# EAGLE board nokia-phone-arduino-shield (EAGLE 6.5.0)
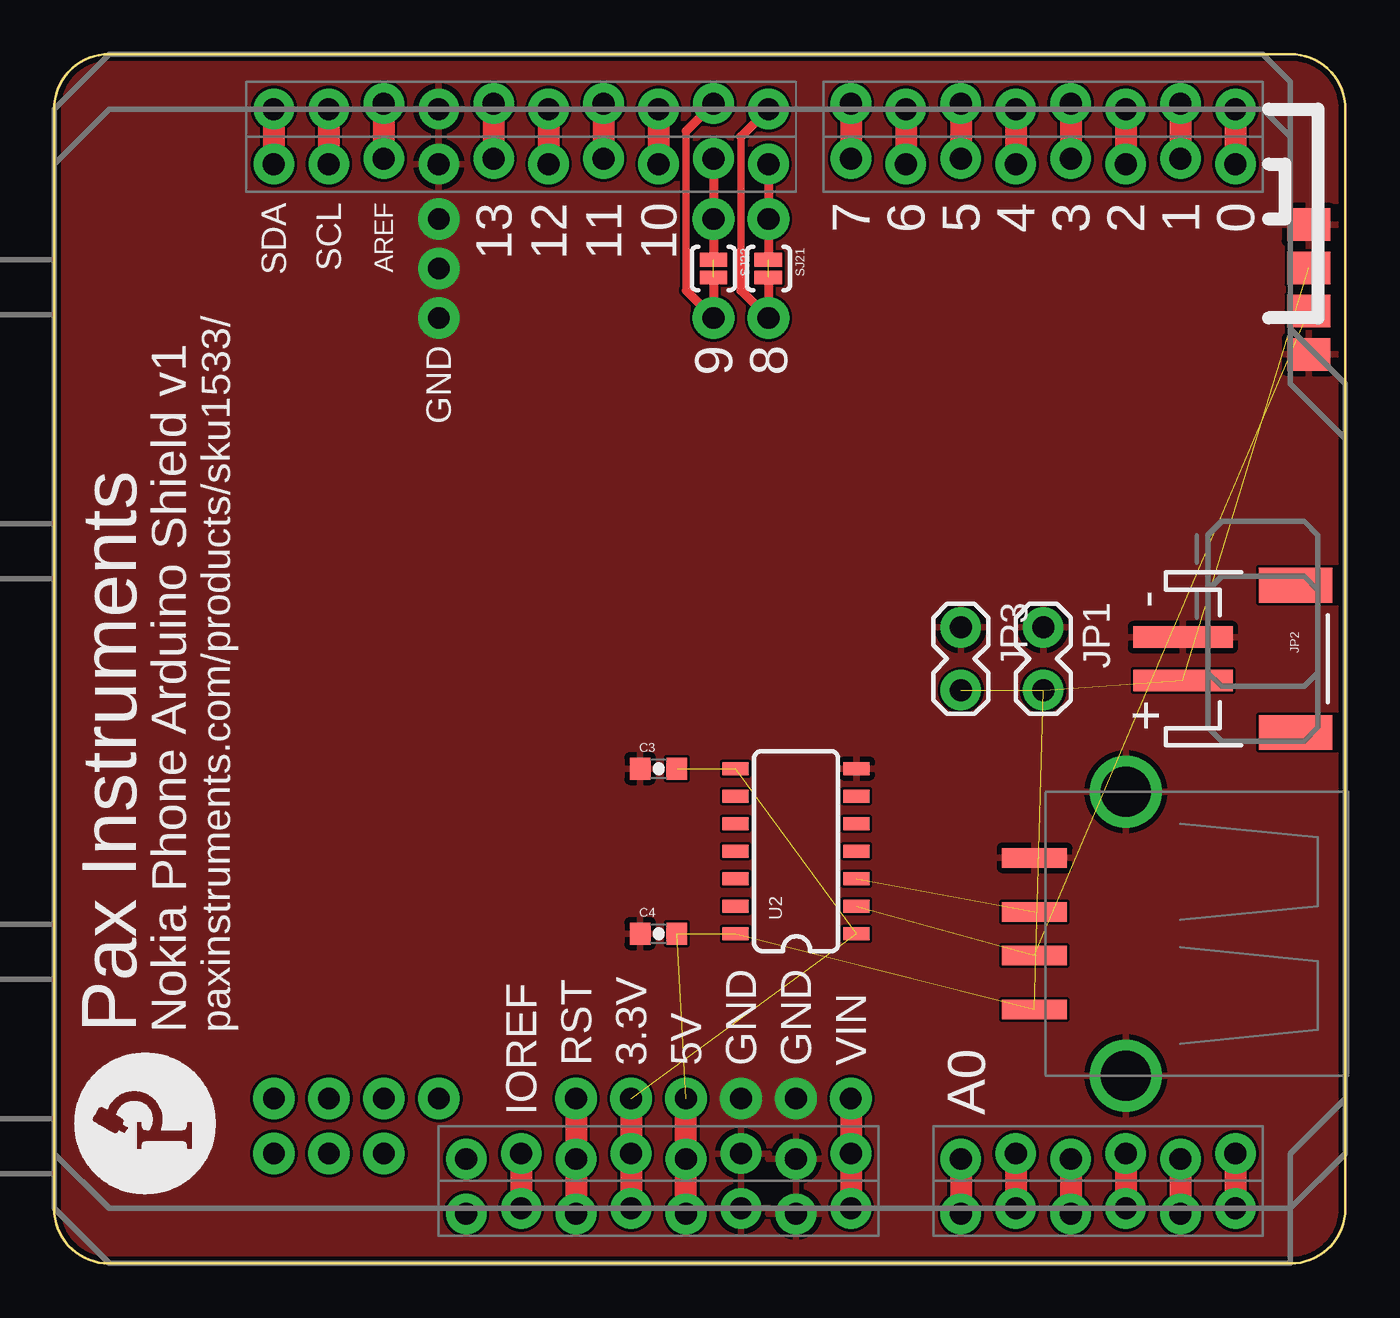
[diagram p0: board, top side]
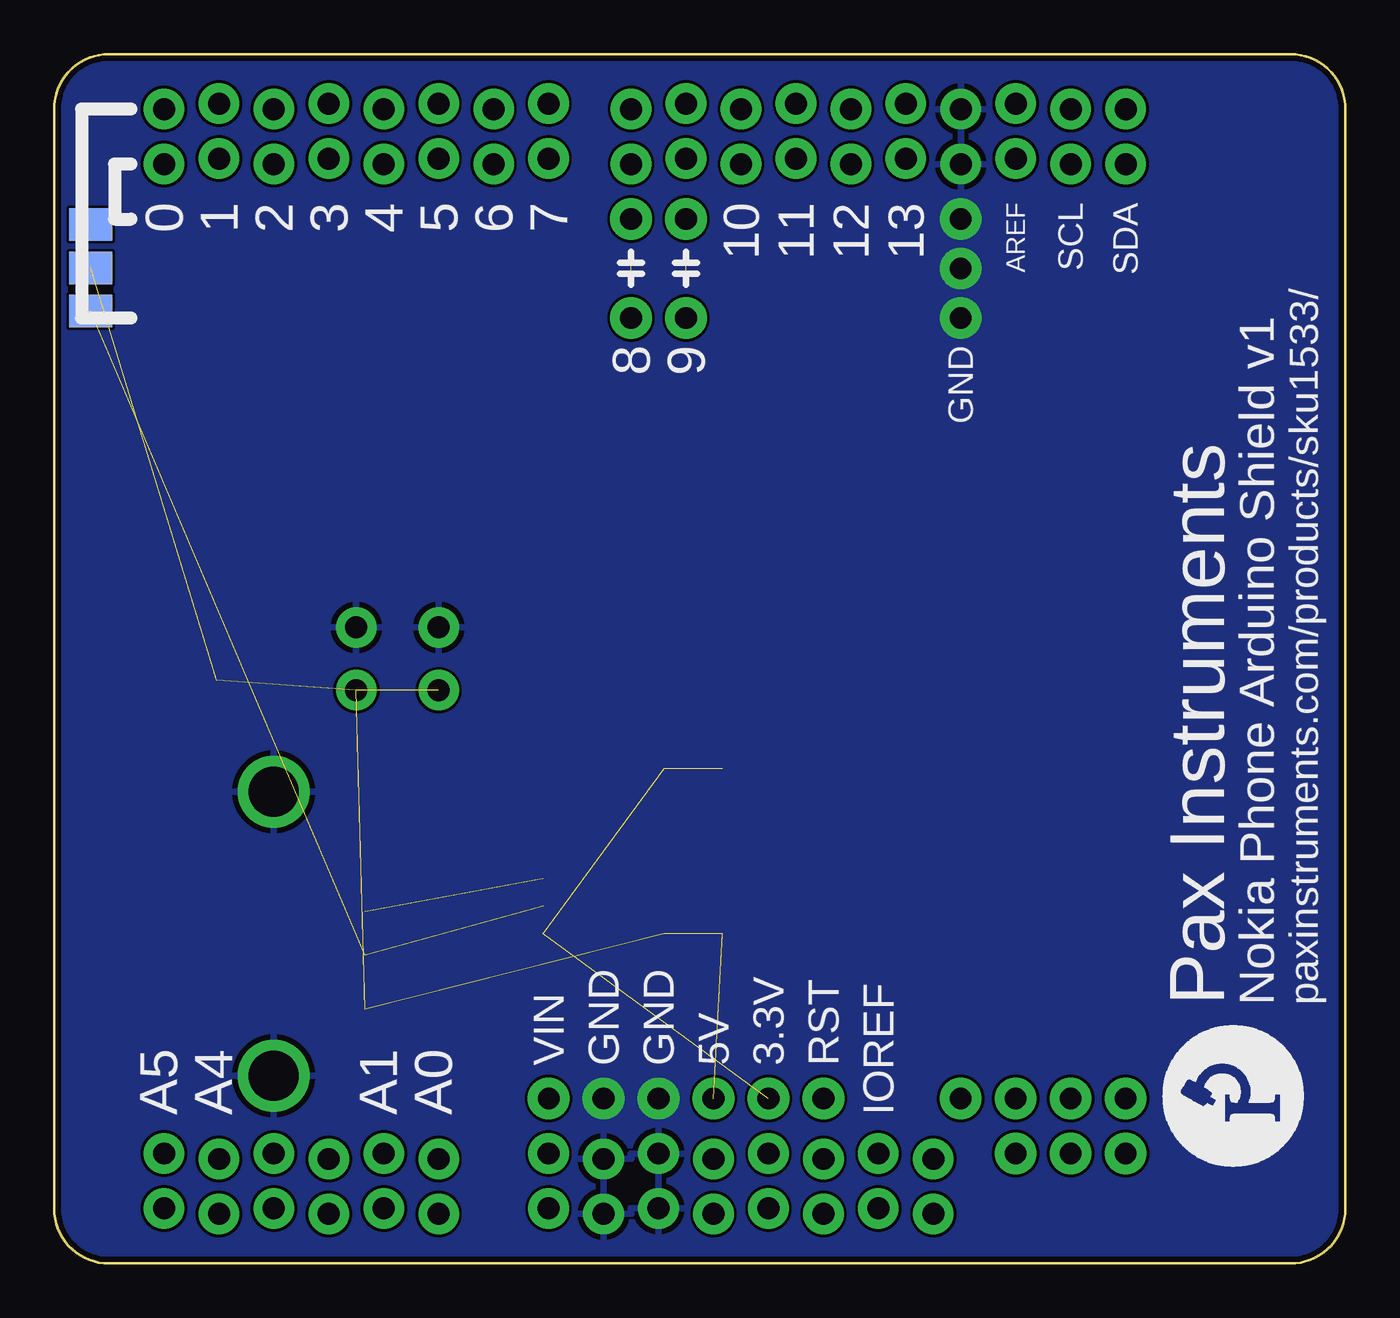
[diagram p1: board, bottom side, seen from below]

Size 59.69 x 55.88 mm. Coordinates in mm from the lower left corner, seen from the top.
Outline: 57.15,0 2.54,0 arc-90 0,2.54 0,53.34 arc-90 2.54,55.88 57.15,55.88 arc-90 59.69,53.34 59.69,2.54 arc-90 57.15,0
Copper layers (1*16): Top 0.035mm / dielectric 1.5mm / Bottom 0.035mm
Design rules "PaxInstrument-T400 *": minimum track width 6mil, minimum drill 13mil, track to track 5mil, track to pad 5mil, pad to pad 5mil, via to via 5mil, smd to smd 5mil, copper to edge 10mil, drill to drill 8mil, minimum pad ring 12mil, minimum via ring 10mil, stop-mask expansion 4mil, vias tented up to drill 25mil, thermal gap 10mil
Net classes: 0 default: width 0.203 mm, drill 0.33 mm; 1 power: width 0.305 mm

## Footprints (pad centres in the part's own frame; a part is rotated, then mirrored left to right if it is on the bottom)
SPARKFUN-CAPACITORS_0603-CAP = smd 0.94 x 1.016: 1 -0.85,0; 2 0.85,0
UNO_R3_SHIELD_NOLABELS_LOCK = drill 1.016 pad 1.88: 3.3V 50.8,26.67; 5V 51.054,29.21; A0 51.054,41.91; A1 50.8,44.45; A2 51.054,46.99; A3 50.8,49.53; A4 51.054,52.07; A5 50.8,54.61; AREF 2.286,15.24; D2 2.54,49.53; D3 2.286,46.99; D4 2.54,44.45; D5 2.286,41.91; D6 2.54,39.37; D7 2.286,36.83; D8 2.54,33.02; D9 2.286,30.48; D10 2.54,27.94; D11 2.286,25.4; D12 2.54,22.86; D13 2.286,20.32; GND@0 50.8,31.75; GND@1 51.054,34.29; GND@2 2.54,17.78; IOREF 50.8,21.59; NC 51.054,19.05; RES 51.054,24.13; RX 2.54,54.61; SCL 2.54,10.16; SDA 2.54,12.7; TX 2.286,52.07; VIN 50.8,36.83
1X02_LOCK = drill 1.016 pad 1.88: 1 -0.178,0; 2 2.718,0
JST-2-SMD = smd 1 x 4.6: 1 -1,-3.7; 2 1,-3.7 | smd 1.6 x 3.4: NC1 -3.4,1.5; NC2 3.4,1.5
PAD-1.5X4.5 = smd 1.5 x 2: P$1 0,0
PAD-JUMPER-2-NC_BY_PASTE_YES_SILK = smd 0.635 x 1.27: 1 -0.401,0; 2 0.413,0
SO14 = smd 0.6 x 1.2: 1 -3.81,-2.8; 2 -2.54,-2.8; 3 -1.27,-2.8; 4 0,-2.8; 5 1.27,-2.8; 6 2.54,-2.8; 7 3.81,-2.8; 8 3.81,2.8; 9 2.54,2.8; 10 1.27,2.8; 11 0,2.8; 12 -1.27,2.8; 13 -2.54,2.8; 14 -3.81,2.8
USB-A-S-NOSILK-FEMALE = smd 3 x 0.9: D+ 4.212,-1; D- 4.212,1; GND 4.212,-3.5; VBUS 4.212,3.5 | drill 2.311: S1 0,-6.566; S2 0,6.566

## Placement (x,y rotation side)
C3  100nF  [SPARKFUN-CAPACITORS_0603-CAP]  27.94,22.86 0 top
C4  100nF  [SPARKFUN-CAPACITORS_0603-CAP]  27.94,15.24 0 top
J1  ARDUINO_R3_SHIELD  [UNO_R3_SHIELD_NOLABELS_LOCK]  0,55.88 270 top
J3  ARDUINO_R3_SHIELD  [UNO_R3_SHIELD_NOLABELS_LOCK]  0,53.34 270 top
JP1  [1X02_LOCK]  45.72,29.21 270 top
JP2  [JST-2-SMD]  55.88,27.94 270 top
JP3  [1X02_LOCK]  41.91,29.21 270 top
POP2  [PAD-1.5X4.5]  58,48 90 top
POP3  [PAD-1.5X4.5]  58,48 90 bottom
POP4  [PAD-1.5X4.5]  58,46 90 top
POP5  [PAD-1.5X4.5]  58,46 90 bottom
POP6  [PAD-1.5X4.5]  58,44 270 top
POP7  [PAD-1.5X4.5]  58,44 90 bottom
POP8  [PAD-1.5X4.5]  58,42 90 top
SJ21  JUMPER-PAD-2-NC_BY_PASTE  [PAD-JUMPER-2-NC_BY_PASTE_YES_SILK]  33.02,45.97 270 top
SJ22  JUMPER-PAD-2-NC_BY_PASTE  [PAD-JUMPER-2-NC_BY_PASTE_YES_SILK]  30.48,45.97 270 top
U2  [SO14]  34.29,19.05 90 top
U$1  [PAXINSTRUMENT_LOGO]  1.78,4.32 90 bottom
U$2  USB+SHIELDUSB-A-S-NOSILK-FEMALE  [USB-A-S-NOSILK-FEMALE]  49.53,15.24 180 top
U$6  [PAXINSTRUMENT_LOGO]  7.62,3.05 90 top

## Library data of the parts
C3 C4 = PaxInstrument-T400; MPN: CL10B104KO8NNNC; OC_DIGIKEY: 1276-1005-2-ND
J1 J3 = SparkFun-Boards
JP1 JP3 POP2-POP8 U$2 = SparkFun-Connectors
JP2 = SparkFun-Connectors; PROD_ID: CONN-11443
SJ21 SJ22 = SparkFun-Passives
U2 = SparkFun-DigitalIC; MPN: TXB0104DR; OC_DIGIKEY: 296-21928-2-ND; PROD_ID: IC-11329
U$1 U$6 = PaxInstrument-T400

## Nets
3.3V: C3.2 J1.3.3V J3.3.3V U2.1 U2.8
5V: C4.2 J1.5V J3.5V JP1.2 JP2.2 JP3.2 POP5.P$1 U2.14 U$2.VBUS
A0: J1.A0 J3.A0
A1: J1.A1 J3.A1
A2: J1.A2 J3.A2
A3: J1.A3 J3.A3
A4: J1.A4 J3.A4
A5: J1.A5 J3.A5
ARDUIN_TX: U2.12
ARDUINO_RX: U2.13
AREF: J1.AREF J3.AREF
D0: J1.RX J3.RX
D1: J1.TX J3.TX
D2: J1.D2 J3.D2
D3: J1.D3 J3.D3
D4: J1.D4 J3.D4
D5: J1.D5 J3.D5
D6: J1.D6 J3.D6
D7: J1.D7 J3.D7
D8: J1.D8 J3.D8 SJ21.1 SJ21.2
D9: J1.D9 J3.D9 SJ22.1 SJ22.2
D10: J1.D10 J3.D10
D11(MOSI): J1.D11 J3.D11
D12(MISO): J1.D12 J3.D12
D13(SCK): J1.D13 J3.D13
FBUS_RX: U2.3 U$2.D+
FBUS_TX: POP7.P$1 U2.2 U$2.D-
FUBS_RX: POP6.P$1
GND: C3.1 C4.1 J1.GND@0 J1.GND@1 J1.GND@2 J3.GND@0 J3.GND@1 J3.GND@2 JP1.1 JP2.1 JP3.1 POP2.P$1 POP8.P$1 U2.7 U$2.GND U$2.S1 U$2.S2
IOREF: J1.IOREF J3.IOREF
N$218: POP4.P$1
RESET: J1.RES J3.RES
SCL: J1.SCL J3.SCL
SDA: J1.SDA J3.SDA
VIN: J1.VIN J3.VIN

## Tracks (layer width: path | path; a pad name or v marks a point on that pad's centre or on a via)
3.3V  (via drill 1 pad 1.93)  (3 unrouted)
  Top 1.016: v26.67,7.62 J1.3.3V J3.3.3V
5V  (via drill 1 pad 1.93)  (7 unrouted)
  Top 1.016: J3.5V J1.5V v29.21,7.62
A0
  Top 1.016: J1.A0 J3.A0
A1
  Top 1.016: J1.A1 J3.A1
A2
  Top 1.016: J1.A2 J3.A2
A3
  Top 1.016: J1.A3 J3.A3
A4
  Top 1.016: J1.A4 J3.A4
A5
  Top 1.016: J1.A5 J3.A5
AREF
  Top 1.016: J1.AREF J3.AREF
D0
  Top 1.016: J1.RX J3.RX
D1
  Top 1.016: J1.TX J3.TX
D2
  Top 1.016: J1.D2 J3.D2
D3
  Top 1.016: J1.D3 J3.D3
D4
  Top 1.016: J1.D4 J3.D4
D5
  Top 1.016: J1.D5 J3.D5
D6
  Top 1.016: J1.D6 J3.D6
D7
  Top 1.016: J1.D7 J3.D7
D8  (via drill 1 pad 1.93)  (1 unrouted)
  Top 0.356: 31.75,52.07 31.75,44.96
  Top 0.406: J3.D8 v33.02,48.26 SJ21.1 | SJ21.2 v33.02,43.69 31.75,44.96 | J1.D8 31.75,52.07
D9  (via drill 1 pad 1.93)  (1 unrouted)
  Top 0.356: 29.21,52.32 29.21,44.96
  Top 0.406: J3.D9 v30.48,48.26 SJ22.1 | SJ22.2 v30.48,43.69 29.21,44.96 | J1.D9 29.21,52.32
D10
  Top 1.016: J1.D10 J3.D10
D11(MOSI)
  Top 1.016: J1.D11 J3.D11
D12(MISO)
  Top 1.016: J1.D12 J3.D12
D13(SCK)
  Top 1.016: J1.D13 J3.D13 20.32,50.8
FBUS_RX  (1 unrouted)
FBUS_TX  (2 unrouted)
GND  (via drill 1 pad 1.93)
  other vias: 17.78,43.69 17.78,48.26 31.75,7.62 34.29,7.62 17.78,45.97
  pour Bottom: 59.69,55.88 59.69,0 0,0 0,55.88
  pour Top: 59.69,55.88 59.69,0 0,0 0,55.88
IOREF
  Top 1.016: J1.IOREF J3.IOREF
N$160  (via drill 1 pad 1.93)
  other vias: 10.16,7.62
N$161  (via drill 1 pad 1.93)
  other vias: 12.7,7.62
N$162  (via drill 1 pad 1.93)
  other vias: 15.24,7.62
N$163  (via drill 1 pad 1.93)
  other vias: 10.16,5.08
N$164  (via drill 1 pad 1.93)
  other vias: 12.7,5.08
N$165  (via drill 1 pad 1.93)
  other vias: 15.24,5.08
N$217  (via drill 1 pad 1.93)
  other vias: 17.78,7.62
RESET  (via drill 1 pad 1.93)
  Top 1.016: J3.RES J1.RES v24.13,7.62
SCL
  Top 1.016: J1.SCL J3.SCL
SDA
  Top 1.016: J1.SDA J3.SDA
VIN  (via drill 1 pad 1.93)
  Top 1.016: v36.83,7.62 J1.VIN J3.VIN

## Text on the board
tPlace: SDA | SCL | AREF | 13 | 12 | 11 | 10 | 7 | 6 | 5 | 4 | 3 | 2 | 1 | 0 | GND | 9 | 8 | Pax Instruments | Nokia Phone Arduino Shield v1 | paxinstruments.com/products/sku1533/ | RST | 3.3V | 5V | GND | GND | VIN | IOREF | A0
bPlace: SDA | SCL | AREF | 13 | 12 | 11 | 10 | 7 | 6 | 5 | 4 | 3 | 2 | 1 | 0 | GND | 9 | 8 | paxinstruments.com/products/sku1533/ | Nokia Phone Arduino Shield v1 | Pax Instruments | RST | 3.3V | 5V | GND | GND | VIN | IOREF | A0 | A1 | A4 | A5